# Altium PCB PCB_运放.pcbdoc
Units mil, origin at the board's own origin, x right, y up, seen from the top; angles counter-clockwise.
Board outline 3086.21 x 3420 mil, 2 copper layers (Top Layer, Bottom Layer); 83 components, 58 nets, 212 pads, 8 vias.
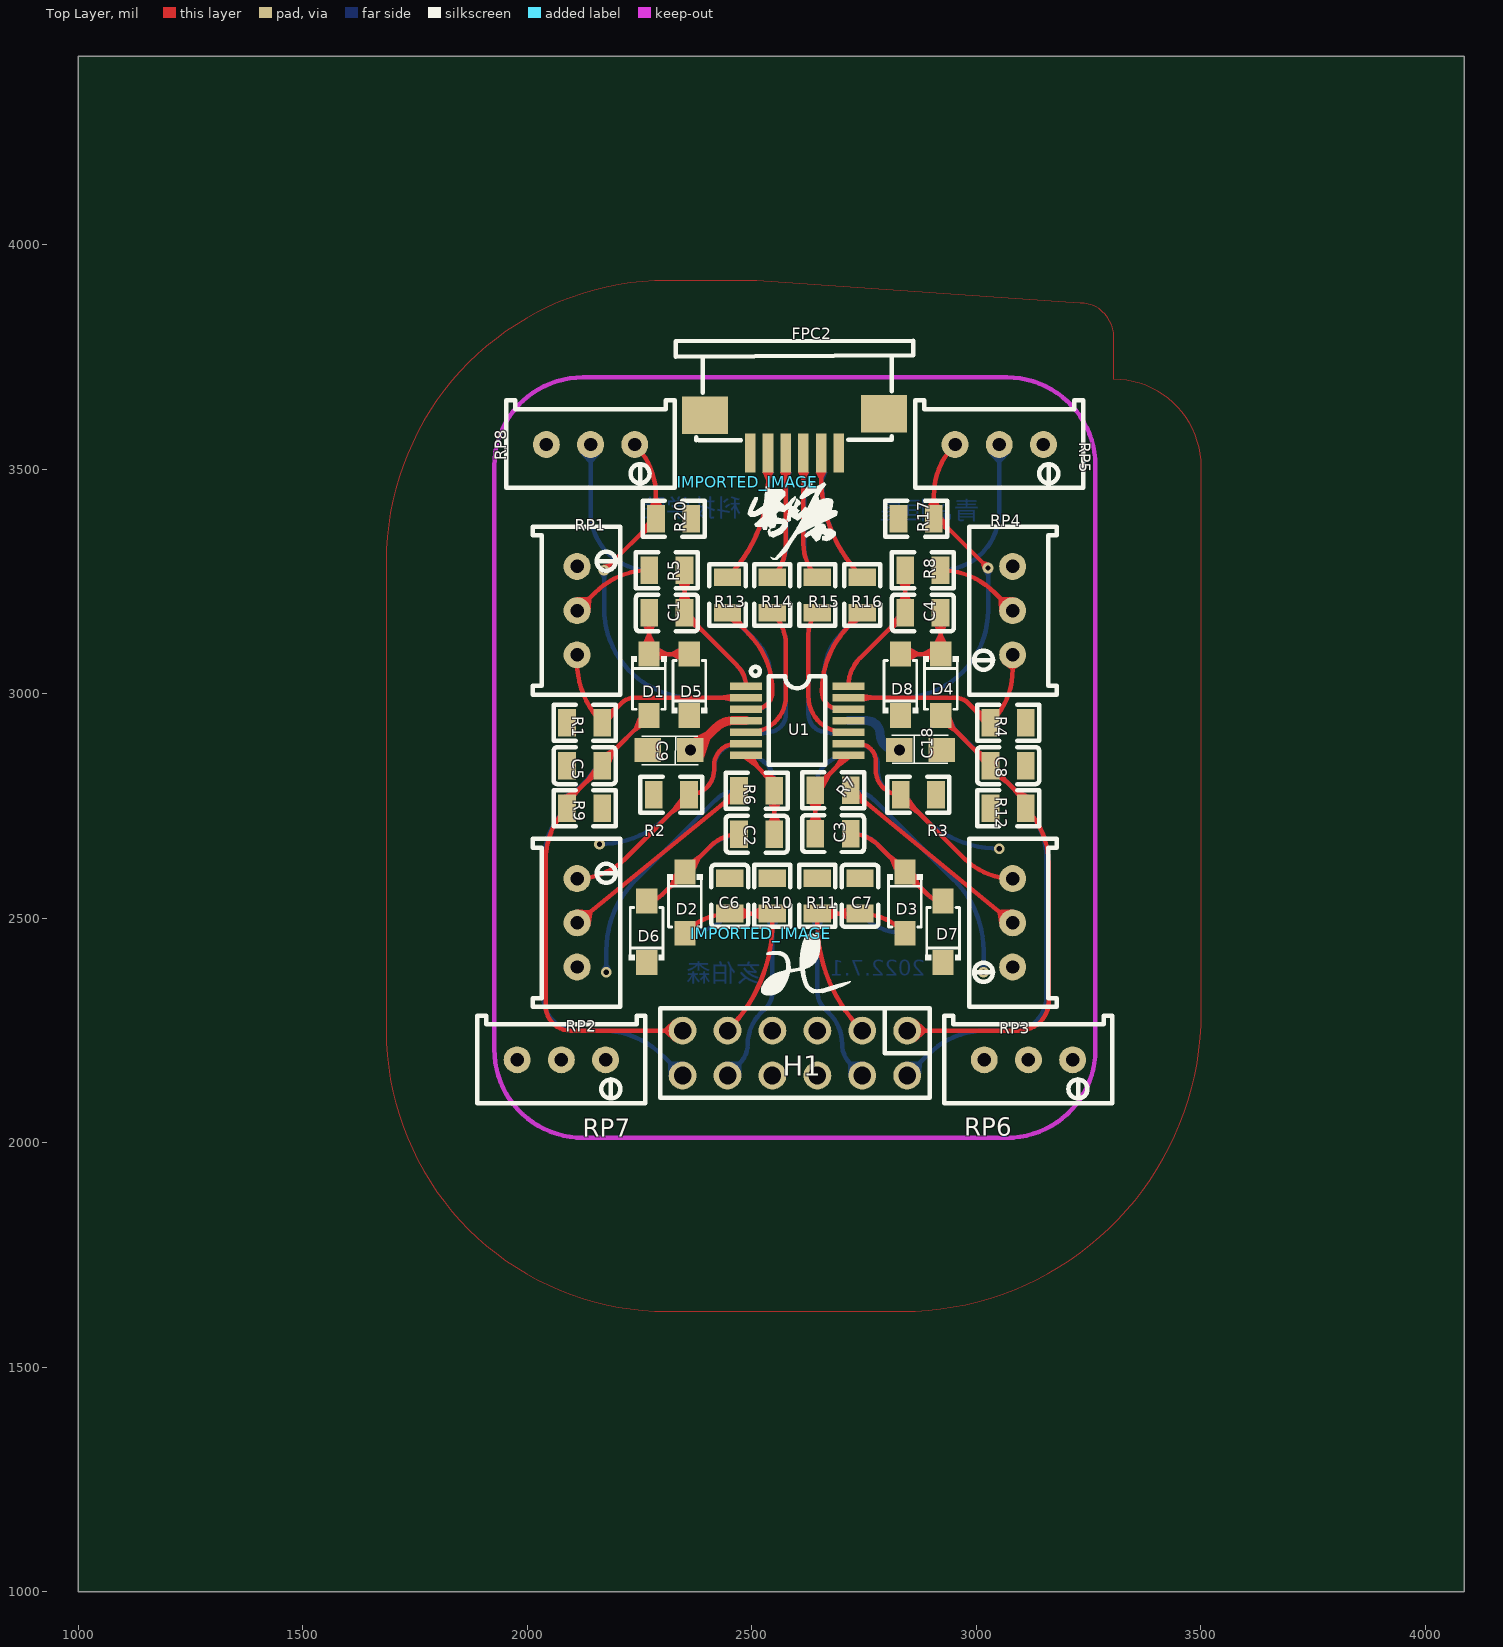
[diagram p0: Top Layer view]
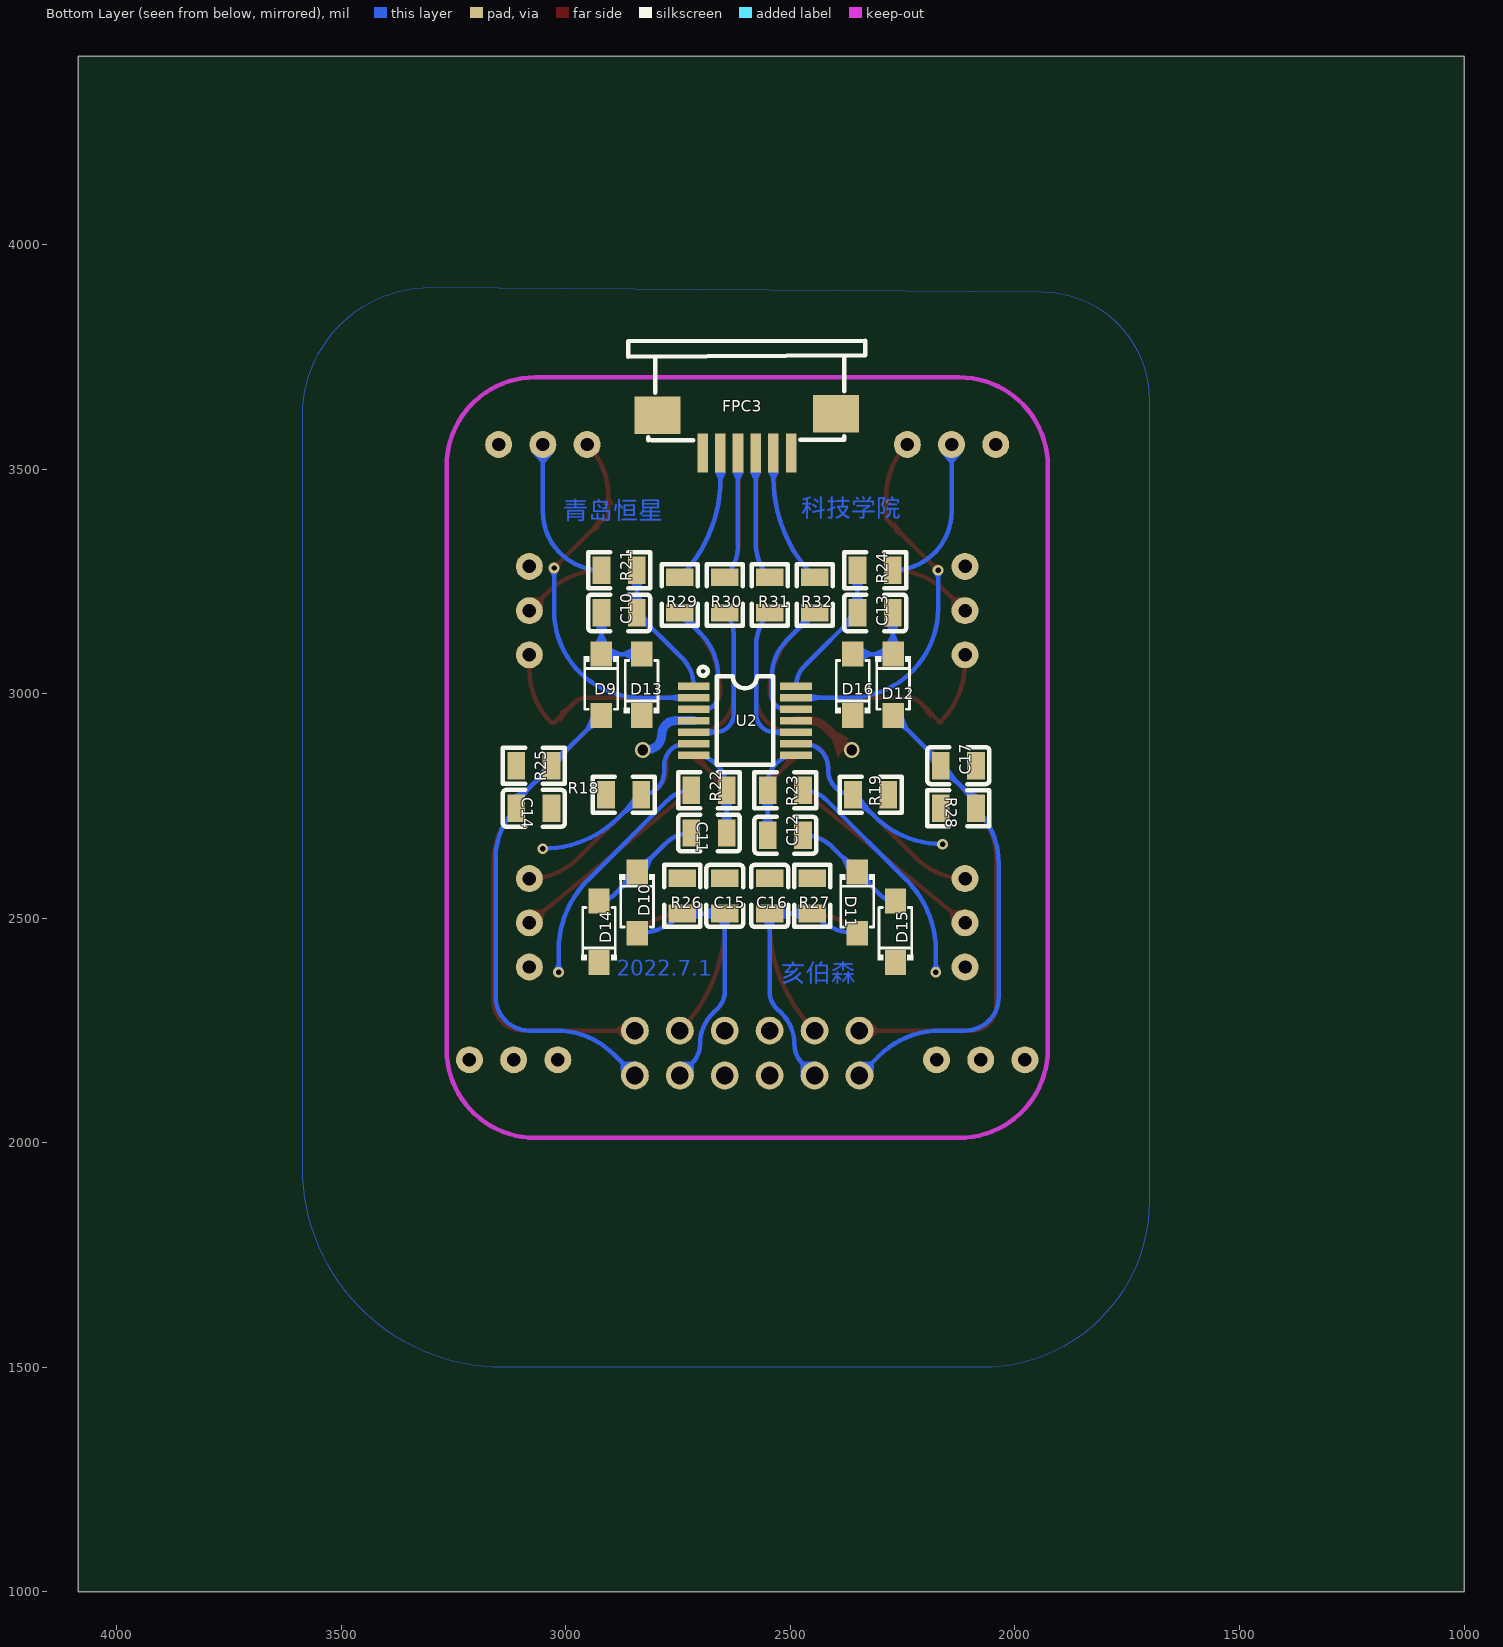
[diagram p1: Bottom Layer view, seen from below]

## Layer stack, top to bottom
Top Layer: signal copper (thickness not stored)
Dielectric: dielectric 12.6, FR-4, Dk 4.8
Bottom Layer: signal copper (thickness not stored)

## Board outline
4086.21,1000 1000,1000 1000,4420 4086.21,4420

## Components (designator, comment, footprint, x,y, rotation, side; value= is the part's Value field where it differs from the comment)
C1 "0.1uF" C0805#1 2311.21,3180 r180 top
C2 "0.1uF" C0805#1 2511.21,2687.19 r0 top
C3 "0.1uF" C0805#1 2681.21,2688.6 r180 top
C4 "0.1uF" C0805#1 2881.21,3180 r0 top
C5 "0.1uF" C0805#1 2128.02,2840 r180 top
C6 "0.1uF" C0805#1 2451.21,2550 r90 top
C7 "0.1uF" C0805#1 2741.21,2550 r270 top
C8 "0.1uF" C0805#1 3071.21,2840 r180 top
C9 "106 16V" CASE-A_3216 2316.21,2875 r180 top
C10 "0.1uF" C0805#2 2881.21,3180 r180 bottom
C11 "0.1uF" C0805#2 2681.21,2690 r0 bottom
C12 "0.1uF" C0805#2 2511.21,2685 r180 bottom
C13 "0.1uF" C0805#2 2311.21,3180 r0 bottom
C14 "0.1uF" C0805#2 3071.21,2745 r0 bottom
C15 "0.1uF" C0805#2 2646.21,2550 r270 bottom
C16 "0.1uF" C0805#2 2546.21,2550 r90 bottom
C17 "0.1uF" C0805#2 2126.21,2840 r180 bottom
C18 "106 16V" CASE-A_3216 2876.21,2875 r0 top
D1 "1N5819" SOD-123FL_L2.7-W1.8-LS3.8-RD#1 2271.21,3020 r270 top
D2 "1N5819" SOD-123FL_L2.7-W1.8-LS3.8-RD#1 2351.21,2535 r270 top
D3 "1N5819" SOD-123FL_L2.7-W1.8-LS3.8-RD#1 2841.21,2535 r270 top
D4 "1N5819" SOD-123FL_L2.7-W1.8-LS3.8-RD#1 2921.21,3020 r270 top
D5 "1N5819" SOD-123FL_L2.7-W1.8-LS3.8-RD#1 2361.21,3020 r90 top
D6 "1N5819" SOD-123FL_L2.7-W1.8-LS3.8-RD#1 2266.21,2470 r90 top
D7 "1N5819" SOD-123FL_L2.7-W1.8-LS3.8-RD#1 2926.21,2470 r90 top
D8 "1N5819" SOD-123FL_L2.7-W1.8-LS3.8-RD#1 2831.21,3020 r90 top
D9 "1N5819" SOD-123FL_L2.7-W1.8-LS3.8-RD#2 2921.21,3020 r90 bottom
D10 "1N5819" SOD-123FL_L2.7-W1.8-LS3.8-RD#2 2841.21,2535 r90 bottom
D11 "1N5819" SOD-123FL_L2.7-W1.8-LS3.8-RD#2 2351.21,2535 r90 bottom
D12 "1N5819" SOD-123FL_L2.7-W1.8-LS3.8-RD#2 2271.21,3020 r90 bottom
D13 "1N5819" SOD-123FL_L2.7-W1.8-LS3.8-RD#2 2831.21,3020 r270 bottom
D14 "1N5819" SOD-123FL_L2.7-W1.8-LS3.8-RD#2 2926.21,2470 r270 bottom
D15 "1N5819" SOD-123FL_L2.7-W1.8-LS3.8-RD#2 2266.21,2470 r270 bottom
D16 "1N5819" SOD-123FL_L2.7-W1.8-LS3.8-RD#2 2361.21,3020 r270 bottom
FPC2 "FPC1.0-6P" FPC-SMD_8P-P1.00_FPC1.0-8P-SJ#1 2556.21,3580 r0 top
FPC3 "FPC1.0-6P" FPC-SMD_8P-P1.00_FPC1.0-8P-SJ#2 2636.21,3580 r0 bottom
H1 "排母2X6P" KY-排母2*6P间距2.54MM 2846.21,2250 r180 top
IMPORTED_IMAGE "IMPORTED_IMAGE" IMPORTED_IMAGE 2521.22,2465.24 r0 top
IMPORTED_IMAGE "IMPORTED_IMAGE" IMPORTED_IMAGE 2491.23,3470.54 r0 top
R1 "1k" R0805#1 2128.02,2935 r180 top
R2 "1k" R0805#1 2321.21,2775 r0 top
R3 "1k" R0805#1 2871.21,2775 r180 top
R4 "1k" R0805#1 3071.21,2935 r180 top
R5 "47k" R0805#1 2311.21,3275 r0 top
R6 "47k" R0805#1 2511.21,2783.59 r180 top
R7 "47k" R0805#1 2681.21,2785 r0 top
R8 "47k" R0805#1 2881.21,3275 r0 top
R9 "47k" R0805#1 2128.02,2745 r180 top
R10 "47k" R0805#1 2546.21,2550 r270 top
R11 "47k" R0805#1 2646.21,2550 r90 top
R12 "47k" R0805#1 3071.21,2745 r180 top
R13 "5.1k" R0805#1 2446.21,3220 r270 top
R14 "5.1k" R0805#1 2546.21,3220 r270 top
R15 "5.1k" R0805#1 2646.21,3220 r90 top
R16 "5.1k" R0805#1 2746.21,3220 r90 top
R17 "1k" R0805#1 2866.21,3390 r180 top
R18 "1k" R0805#2 2871.21,2775 r0 bottom
R19 "1k" R0805#2 2321.21,2775 r180 bottom
R20 "1k" R0805#1 2326.21,3390 r180 top
R21 "47k" R0805#2 2881.21,3275 r0 bottom
R22 "47k" R0805#2 2681.21,2785 r180 bottom
R23 "47k" R0805#2 2511.21,2785 r0 bottom
R24 "47k" R0805#2 2311.21,3275 r0 bottom
R25 "47k" R0805#2 3071.21,2840 r0 bottom
R26 "47k" R0805#2 2741.21,2550 r90 bottom
R27 "47k" R0805#2 2451.21,2550 r270 bottom
R28 "47k" R0805#2 2126.21,2745 r180 bottom
R29 "5.1k" R0805#2 2746.21,3220 r90 bottom
R30 "5.1k" R0805#2 2646.21,3220 r90 bottom
R31 "5.1k" R0805#2 2546.21,3220 r270 bottom
R32 "5.1k" R0805#2 2446.21,3220 r270 bottom
RP1 "500K" RES-ADJ-TH_3P-L9.5-W4.85-P2.50-BL-BS 2111.21,3185 r0 top
RP2 "500K" RES-ADJ-TH_3P-L9.5-W4.85-P2.50-BL-BS 2111.21,2490 r0 top
RP3 "500K" RES-ADJ-TH_3P-L9.5-W4.85-P2.50-BL-BS 3081.21,2490 r180 top
RP4 "500K" RES-ADJ-TH_3P-L9.5-W4.85-P2.50-BL-BS 3081.21,3185 r180 top
RP5 "500K" RES-ADJ-TH_3P-L9.5-W4.85-P2.50-BL-BS 3051.21,3555 r270 top
RP6 "500K" RES-ADJ-TH_3P-L9.5-W4.85-P2.50-BL-BS 3116.21,2185 r270 top
RP7 "500K" RES-ADJ-TH_3P-L9.5-W4.85-P2.50-BL-BS 2076.21,2185 r270 top
RP8 "500K" RES-ADJ-TH_3P-L9.5-W4.85-P2.50-BL-BS 2141.21,3555 r270 top
U1 "OPA4377" OPA4377#1 2601.21,2940 r0 top
U2 "OPA4377" OPA4377#2 2601.21,2940 r0 bottom
? "" ? 2049.11,2857.5 r0 top
? "" ? 2596.21,2382.55 r0 top

## Footprints (in the part's own frame and the unit in brackets; to place one, negate y for a bottom-side part, rotate by r counter-clockwise, add the part's x,y. Pads: shape width x height; smd on the part's side, far side on the other; paste and mask are expansions set on the pad)
C0805#1 [mm]
  rect 1x1.55 smd paste+0 mask+0.102: 1(-1,0) 2(1,0)
  silkscreen extent -1.75,-1.04 1.75,1.04
C0805#2 [mm]
  rect 1x1.55 smd paste+0 mask+0.102: 1(1,0) 2(-1,0)
  silkscreen extent -1.75,-1.04 1.75,1.04
CASE-A_3216 [mm]
  rect 1.5x1.359 smd paste+0 mask+0.051: 1(-1.2,0) 2(1.2,0)
  silkscreen extent -1.64,-0.76 1.56,0.84
FPC-SMD_8P-P1.00_FPC1.0-8P-SJ#1 [mm]
  rect 0.6x2.2 smd paste+0 mask+0.051: 1(3.497,-1.106) 2(2.497,-1.106) 3(1.495,-1.105) 4(0.496,-1.106) 5(-0.504,-1.106) 6(-1.504,-1.106)
  rect 2.6x2.1 smd paste+0 mask+0.051: 9(6.045,1.106) 10(-4.064,1.016)
  silkscreen extent -5.71,-0.38 7.71,5.24
FPC-SMD_8P-P1.00_FPC1.0-8P-SJ#2 [mm]
  rect 0.6x2.2 smd paste+0 mask+0.051: 1(-3.497,1.106) 2(-2.497,1.106) 3(-1.495,1.105) 4(-0.496,1.106) 5(0.504,1.106) 6(1.504,1.106)
  rect 2.6x2.1 smd paste+0 mask+0.051: 9(-6.045,-1.106) 10(4.064,-1.016)
  silkscreen extent -7.71,-5.24 5.71,0.38
IMPORTED_IMAGE [mil]
  silkscreen extent 0,-137 199,1
KY-排母2*6P间距2.54MM [mil]
  round 62 hole 39 paste+0 mask+2: 1(0,0) 2(0,100) 3(100,0) 4(100,100) 5(200,0) 6(200,100) 7(300,0) 8(300,100) 9(400,0) 10(400,100) 11(500,0) 12(500,100)
  silkscreen extent -50,-50 550,150
OPA4377#1 [mil]
  rect 71x16 smd paste+0 mask+4: 1(-114,76.77) 2(-114,51.18) 3(-114,25.59) 5(-114,-25.59) 6(-114,-51.18) 7(-114,-76.77) 8(114,-76.77) 9(114,-51.18) 10(114,-25.59) 12(114,25.59) 13(114,51.18) 14(114,76.77)
  rect 71x16 smd paste+0 mask+2: 4(-114,0) 11(114,0)
  silkscreen extent -103,-98 63,120
OPA4377#2 [mil]
  rect 71x16 smd paste+0 mask+4: 1(114,-76.77) 2(114,-51.18) 3(114,-25.59) 5(114,25.59) 6(114,51.18) 7(114,76.77) 8(-114,76.77) 9(-114,51.18) 10(-114,25.59) 12(-114,-25.59) 13(-114,-51.18) 14(-114,-76.77)
  rect 71x16 smd paste+0 mask+2: 4(114,0) 11(-114,0)
  silkscreen extent -63,-120 103,98
R0805#1 [mm]
  rect 1x1.55 smd paste+0 mask+0.102: 1(-1,0) 2(1,0)
  silkscreen extent -1.75,-1.02 1.75,1.02
R0805#2 [mm]
  rect 1x1.55 smd paste+0 mask+0.102: 1(1,0) 2(-1,0)
  silkscreen extent -1.75,-1.02 1.75,1.02
RES-ADJ-TH_3P-L9.5-W4.85-P2.50-BL-BS [mil]
  round 60 hole 30 paste+0 mask+2: 1(0,98.43) 2(0,0) 3(0,-98.43)
  silkscreen extent -98,-187 96,187
SOD-123FL_L2.7-W1.8-LS3.8-RD#1 [mm]
  rect 1.4x1.2 smd paste+0 mask+0.051: 1(-1.735,0) 2(1.735,0)
  silkscreen extent -1.6,-1 1.38,1
SOD-123FL_L2.7-W1.8-LS3.8-RD#2 [mm]
  rect 1.4x1.2 smd paste+0 mask+0.051: 1(1.735,0) 2(-1.735,0)
  silkscreen extent -1.38,-1 1.6,1
? [mil]

## Via types
v1: diameter 24.02, hole 12, Top Layer to Bottom Layer, tented both sides, 6 vias
v2: diameter 35, hole 24, Top Layer to Bottom Layer, tented both sides, 2 vias

## Nets (pads, with @x,y where several pads share a name; then routed paths per layer and width w, separated by ;. In a path a pad name is that pad's centre, name@x,y a point inside that pad or via, vN(x,y) a via of type N, cw(c..) or ccw(c..) an arc to the next point about the centre after c; other vN are vias at no path point)
C1_2: C1.2 D1.1 D5.2 | length 181.9
  Top Layer w10: D1.1@2271.81,3089.8 C1.2 ; D1.1@2271.84,3089.83 cw(c2269.69,3089.83) D1.1 D5.2
C2_1: C2.1 D2.1 D6.2 | length 261.4
  Top Layer w10: D6.2 ccw(c2266.21,2586.59) 2300.35,2552.45 ; 2300.31,2552.5 D2.1 2409.11,2661.2 cw(c2471.84,2598.47) C2.1
C3_1: C3.1 D3.1 D7.2 | length 262.1
  Top Layer w10: C3.1 cw(c2720.58,2603.28) 2780.91,2663.61 D3.1 2892.11,2552.5 ; 2892.07,2552.45 ccw(c2926.21,2586.59) D7.2
C4_2: C4.2 D4.1 D8.2 | length 181.9
  Top Layer w10: D8.2 D4.1 cw(c2922.73,3089.83) D4.1@2920.58,3089.83 ; D4.1@2920.61,3089.8 C4.2
C10_2: C10.2 D9.1 D13.2 | length 181.9
  Bottom Layer w10: D13.2 D9.1 cw(c2922.73,3089.83) D9.1@2920.58,3089.83 ; D9.1@2920.61,3089.8 C10.2
C11_1: C11.1 D10.1 D14.2 | length 262.9
  Bottom Layer w10: C11.1 cw(c2720.58,2608.06) 2778.52,2666 D10.1 2892.11,2552.5 ; 2892.07,2552.45 ccw(c2926.21,2586.59) D14.2
C12_1: C12.1 D11.1 D15.2 | length 260.3
  Bottom Layer w10: D15.2 ccw(c2266.21,2586.59) 2300.35,2552.45 ; 2300.31,2552.5 D11.1 2405.41,2657.5 ; 2405.37,2657.47 cw(c2471.84,2590.99) C12.1
C13_2: C13.2 D12.1 D16.2 | length 181.9
  Bottom Layer w10: D12.1@2271.81,3089.8 C13.2 ; D12.1@2271.84,3089.83 cw(c2269.69,3089.83) D12.1 D16.2
GND: C5.2 C6.2 C7.1 C8.1 C9.2 C14.2 C15.2 C16.1 C17.1 C18.2 D5.1 D6.1 D7.1 D8.1 D13.1 D14.1 D15.1 D16.1 FPC2.1 FPC2.6 FPC3.1 FPC3.6 H1.7 R1.2 R2.1 R3.1 R4.1 R9.1 R10.1 R11.2 R12.2 R17.2 R18.1 R19.1 R20.1 R25.1 R26.1 R27.2 R28.2 U1.11 U2.11
IN1: FPC2.5 R13.1 | length 301.3
  Top Layer w10: R13.1 ccw(c2228.55,3477.04) 2536.37,3477.03 ; 2536.41,3477 FPC2.5
IN2: FPC2.4 R14.1 | length 285
  Top Layer w10: R14.1 ccw(c2474.92,3330.66) 2575.74,3330.66 ; 2575.71,3330.7 FPC2.4
IN3: FPC2.3 R15.2 | length 285.5
  Top Layer w10: 2615.07,3334.55 ccw(c2721.39,3334.55) R15.2 ; 2615.11,3334.5 FPC2.3
IN4: FPC2.2 R16.2 | length 301.6
  Top Layer w10: 2654.51,3480.75 ccw(c2967.59,3480.75) R16.2 ; 2654.51,3480.8 FPC2.2
IN5: FPC3.5 R29.1 | length 301.3
  Bottom Layer w10: 2656.01,3477 FPC3.5 ; 2656.05,3477.03 ccw(c2963.88,3477.03) R29.1
IN6: FPC3.4 R30.1 | length 285.1
  Bottom Layer w10: 2616.71,3330.6 FPC3.4 ; 2616.68,3330.65 ccw(c2717.49,3330.65) R30.1
IN7: FPC3.3 R31.2 | length 292.5
  Bottom Layer w10: R31.2 ccw(c2471.04,3334.54) 2577.35,3334.54 ; R31.2 R31.2@2549.21,3265.7 ; 2577.31,3334.5 FPC3.3@2577.31,3536.5
IN8: FPC3.2 R32.2 | length 316.8
  Bottom Layer w10: R32.2@2456.87,3270.03 R32.2 ccw(c2224.83,3480.75) 2537.91,3480.75 ; 2537.91,3480.7 FPC3.2
OUT1: C5.1 D1.2 H1.11 R9.2 | length 1069
  Top Layer w10: R9.2@2100.11,2772.7 C5.1 cw(c2186.4,2839.99) C5.1@2172.96,2853.44 ; R9.2@2100.14,2772.74 ccw(c2127.88,2745.01) 2088.65,2745.01 ccw(c2203.18,2630.48) 2041.21,2630.48 2041.21,2305 ccw(c2096.21,2305) 2096.21,2250 H1.11 ; C5.1@2172.91,2853.4 D1.2
OUT2: C6.1 D2.2 H1.9 R10.2 | length 494.7
  Top Layer w10: D2.2 2355.51,2470.99 cw(c2451.21,2375.29) C6.1 ; H1.9 ccw(c2204.79,2491.42) 2546.21,2491.42 R10.2 ; C6.1 R10.2
OUT3: C7.2 D3.2 H1.3 R11.1 | length 494.7
  Top Layer w10: R11.1 C7.2 ; R11.1 2646.21,2491.42 ccw(c2987.63,2491.42) H1.3 ; C7.2 cw(c2741.21,2375.29) 2836.91,2470.99 D3.2
OUT4: C8.2 D4.2 H1.1 R12.1 | length 1084.1
  Top Layer w10: H1.1 3096.03,2250 ccw(c3096.03,2315.18) 3161.21,2315.18 ; D4.2 ccw(c2923.77,2951.69) D4.2@2921.96,2949.88 ; D4.2@2921.91,2949.9 C8.2 R12.1@3099.11,2772.8 ; R12.1@3099.08,2772.76 cw(c3071.32,2745) R12.1 cw(c2988.35,2622.77) 3161.21,2622.77 3161.21,2310
OUT5: C14.1 D9.2 H1.2 R25.2 | length 1102
  Bottom Layer w10: H1.2 2893.18,2196.97 cw(c3021.21,2068.93) 3021.21,2250 3081.21,2250 ccw(c3081.21,2325) 3156.21,2325 3156.21,2634.84 ccw(c3000.42,2634.84) C14.1 ccw(c3071.32,2745) C14.1@3099.08,2772.76 ; D9.2 3031.11,2841.8 cw(c3029.28,2840) R25.2 ; R25.2 C14.1@3099.11,2772.8
OUT6: C15.1 D10.2 H1.4 R26.2 | length 600.5
  Bottom Layer w10: R26.2 C15.1 2646.21,2336.2 ccw(c2697.42,2336.21) 2661.21,2300 2672.93,2288.28 cw(c2604.64,2220) 2701.21,2220 ccw(c2761.57,2220) 2718.89,2177.32 H1.4 ; R26.2 2745.51,2506.33 ccw(c2841.21,2602.03) D10.2
OUT7: C16.2 D11.2 H1.10 R27.1 | length 600.5
  Bottom Layer w10: D11.2 ccw(c2351.21,2602.03) 2446.91,2506.33 R27.1 ; H1.10 2473.53,2177.32 ccw(c2430.86,2220) 2491.21,2220 cw(c2587.78,2220) 2519.49,2288.28 2531.21,2300 ccw(c2495,2336.21) 2546.21,2336.21 C16.2 R27.1
OUT8: C17.2 D12.2 H1.12 R28.1 | length 1100.2
  Bottom Layer w10: R28.1@2098.31,2772.8 C17.2 cw(c2180.21,2840) C17.2@2169.86,2850.35 ; R28.1@2098.34,2772.76 ccw(c2126.09,2745) R28.1 ccw(c2209.07,2622.77) 2036.21,2622.77 2036.21,2325 ccw(c2111.21,2325) 2111.21,2250 2166.21,2250 cw(c2166.21,2056.86) 2302.78,2193.43 H1.12 ; C17.2@2169.91,2850.3 D12.2
R5_1: R5.1 RP1.2 | length 190.6
  Top Layer w10: RP1.2 2151.28,3225.06 cw(c2271.84,3104.51) R5.1
R6_2: R6.2 RP2.2 | length 465
  Top Layer w10: RP2.2 R6.2
R7_2: R7.2 RP3.2 | length 465.9
  Top Layer w10: R7.2 RP3.2
R8_2: R8.2 RP4.2 | length 190.6
  Top Layer w10: R8.2 cw(c2920.58,3104.48) 3041.15,3225.06 RP4.2
R21_1: R21.1 RP5.2 | length 354.6
  Bottom Layer w10: R21.1 ccw(c2920.58,3405.62) 3051.2,3405.62 RP5.2
R22_2: R22.2 RP6.2 | length 759.2
  Mid-Layer 2 w10: v1(3016.21,2380) ccw(c3245.58,2380) 3083.39,2217.81 RP6.2
  Bottom Layer w10: R22.2 cw(c2720.58,2711.05) 2772.87,2763.34 2951.21,2585 cw(c2794.29,2428.08) 3016.21,2428.08 v1(3016.21,2380)
R23_2: R23.2 RP7.2 | length 759.2
  Mid-Layer 2 w10: RP7.2 2109.03,2217.82 ccw(c1946.86,2380) v1(2176.21,2380)
  Bottom Layer w10: v1(2176.21,2380) 2176.21,2428.08 cw(c2398.13,2428.08) 2241.21,2585 2419.55,2763.34 cw(c2471.84,2711.05) R23.2
R24_2: R24.2 RP8.2 | length 354.6
  Bottom Layer w10: RP8.2 2141.21,3405.63 ccw(c2271.84,3405.63) R24.2
U1_1: C1.1 R5.2 U1.1 | length 312
  Top Layer w10: R5.2 C1.1 2468.41,3062.2 cw(c2422.99,3016.77) U1.1
U1_2: R1.1 RP1.3 U1.2 | length 508.6
  Top Layer w10: RP1.3 2111.21,3070.63 ccw(c2303.02,3070.63) R1.1 cw(c2170.25,2935) R1.1@2168.23,2937.02 ; R1.1@2168.21,2937 2211.21,2980 cw(c2238.2,2953.01) 2238.2,2991.18 U1.2
U1_3: R13.2 U1.3 | length 290.7
  Top Layer w10: R13.2 2492.71,3134.1 ; U1.3 2506.8,2965.59 ccw(c2506.8,3005) 2546.21,3005 ccw(c2363.62,3005) 2492.73,3134.11
U1_5: R14.2 U1.5 | length 328.6
  Top Layer w10: U1.5 2495.62,2914.41 ccw(c2495.62,2995) 2576.21,2995 2576.21,3108.2 ccw(c2473.78,3108.2) R14.2
U1_6: R2.2 RP2.1 U1.6 | length 515.8
  Top Layer w10: RP2.1 ccw(c2111.21,2740.04) 2218.42,2632.84 ; 2218.41,2632.8 R2.2 ccw(c2360.58,2830.63) 2416.21,2830.63 2416.21,2840 cw(c2465.03,2840) 2465.03,2888.82 U1.6
U1_7: C2.2 R6.1 U1.7 | length 200.6
  Top Layer w10: U1.7 R6.1@2539.11,2811.4 ; R6.1@2539.08,2811.36 cw(c2511.3,2783.59) R6.1 C2.2
U1_8: C3.2 R7.1 U1.8 | length 204.5
  Top Layer w10: C3.2 R7.1 ; R7.1 cw(c2653.57,2785) 2645.28,2793.3 U1.8
U1_9: R3.2 RP3.3 U1.9 | length 510.1
  Top Layer w10: U1.9 2737.39,2888.82 cw(c2737.39,2850) 2776.21,2850 2776.21,2830.63 ccw(c2831.84,2830.63) R3.2 ; R3.2 2974.01,2632.8 ccw(c3081.21,2740.01) RP3.3
U1_10: R15.1 U1.10 | length 326
  Top Layer w10: R15.1 ccw(c2694.49,3132.35) 2626.21,3132.35 2626.21,2995 ccw(c2706.8,2995) 2706.8,2914.41 U1.10
U1_12: R16.1 U1.12 | length 285.5
  Top Layer w10: U1.12 2695.62,2965.59 cw(c2695.62,3005) 2656.21,3005 cw(c2862.94,3005) 2716.76,3151.18 ; 2716.71,3151.2 R16.1
U1_13: R4.2 RP4.1 U1.13 | length 502.4
  Top Layer w10: U1.13 2954.21,2991.2 cw(c2954.22,2953.01) 2981.21,2980 R4.2@3022.21,2939 ; R4.2@3022.23,2938.98 ccw(c3031.84,2948.59) R4.2 ccw(c2912.65,3054.19) 3081.21,3054.19 RP4.1
U1_14: C4.1 R8.1 U1.14 | length 306.8
  Top Layer w10: U1.14 cw(c2803.57,3016.77) 2741.09,3079.25 ; 2741.11,3079.3 C4.1 R8.1
U2_1: C10.1 R21.2 U2.1 | length 306.9
  Bottom Layer w10: U2.1 cw(c2803.56,3016.78) 2741.09,3079.25 ; 2741.11,3079.2 C10.1 R21.2
U2_2: R17.1 RP5.3 U2.2 | length 859.3
  Top Layer w10: 2905.61,3441 R17.1 cw(c2905.58,3364.32) R17.1@2923.74,3382.47 ; 2905.58,3441.05 cw(c3066.73,3441.05) RP5.3 ; R17.1@2923.71,3382.5 v1(3026.21,3280)
  Bottom Layer w10: U2.2 2832.41,2991.2 ccw(c2832.39,3185) 3026.21,3185 v1(3026.21,3280)
U2_3: R29.2 U2.3 | length 285.8
  Bottom Layer w10: 2700.51,3135 R29.2 ; 2700.54,3134.96 ccw(c2795.5,3040) 2661.21,3040 2661.21,2995 ccw(c2690.62,2995) 2690.62,2965.59 U2.3
U2_5: R30.2 U2.5 | length 343.1
  Bottom Layer w10: R30.2 ccw(c2694.48,3132.35) 2626.21,3132.35 2626.21,2955 ccw(c2666.8,2955) 2666.8,2914.41 U2.5
U2_6: R18.2 RP6.1 U2.6 | length 1009.8
  Mid-Layer 2 w10: v1(3051.21,2655) cw(c3051.21,2491.58) 3214.63,2491.58 RP6.1
  Bottom Layer w10: U2.6 2732.39,2888.82 cw(c2732.39,2840) 2781.21,2840 2781.21,2825.63 ccw(c2831.84,2825.63) R18.2 ; R18.2 2881.61,2725.3 ; 2881.57,2725.27 ccw(c3051.21,2894.9) v1(3051.21,2655)
U2_7: C11.2 R22.1 U2.7 | length 215.1
  Bottom Layer w10: C11.2 R22.1 ; R22.1 2641.84,2789.86 cw(c2715.21,2789.86) U2.7
U2_8: C12.2 R23.1 U2.8 | length 214.4
  Bottom Layer w10: U2.8 cw(c2487.21,2799.86) 2550.58,2799.86 R23.1 C12.2
U2_9: R19.2 RP7.3 U2.9 | length 1013.8
  Mid-Layer 2 w10: RP7.3 1977.79,2481.58 cw(c2161.21,2481.58) v1(2161.21,2665)
  Bottom Layer w10: v1(2161.21,2665) ccw(c2161.21,2880.76) 2313.77,2728.19 ; 2313.81,2728.2 R19.2 ccw(c2360.58,2830.63) 2416.21,2830.63 2416.21,2835 cw(c2470.03,2835) 2470.03,2888.82 U2.9
U2_10: R31.1 U2.10 | length 345.8
  Bottom Layer w10: U2.10 2535.61,2914.4 ccw(c2535.61,2955) 2576.21,2955 2576.21,3108.21 ccw(c2473.79,3108.21) R31.1
U2_12: R32.1 U2.12 | length 291
  Bottom Layer w10: R32.1 2508.91,3117.9 ; U2.12 2511.8,2965.59 ccw(c2511.8,2995) 2541.21,2995 2541.21,3040 ccw(c2431.06,3040) 2508.95,3117.89
U2_13: R20.2 RP8.1 U2.13 | length 855.3
  Top Layer w10: v1(2171.21,3275) ccw(c2171.21,3276.53) v1@2172.29,3275.45 ; v1@2172.31,3275.4 R20.2 2286.81,3441 ; RP8.1 cw(c2125.69,3441.05) 2286.84,3441.05
  Bottom Layer w10: v1(2171.21,3275) 2171.21,3190 ccw(c2370.03,3190) 2370.03,2991.18 2380.03,2991.18 U2.13
U2_14: C13.1 R24.1 U2.14 | length 312
  Bottom Layer w10: R24.1 C13.1 2468.41,3062.2 cw(c2423,3016.78) U2.14
VCC: C9.1 C18.1 H1.5 U1.4 U2.4 | length 1678.9
  Top Layer w20: v2(2363.45,2875) ccw(c2363.45,2893.73) 2376.7,2880.49 2421.21,2925 cw(c2457.42,2888.79) 2457.42,2940 U1.4
  Mid-Layer 1 w20: v2(2363.45,2875) ccw(c3189.69,2875) 2605.45,2290.76 H1.5 ccw(c2204.99,2691.22) 2828.97,2691.22 v2(2828.97,2875)
  Bottom Layer w20: U2.4 2756.21,2940 cw(c2756.22,2910) 2786.21,2910 ccw(c2821.21,2910) 2821.21,2875 v2(2828.97,2875)
pads on no net: FPC2.9 FPC2.10 FPC3.9 FPC3.10 H1.6 H1.8 RP1.1 RP2.3 RP3.1 RP4.3 RP5.1 RP6.3 RP7.1 RP8.3

## Polygon pours and split planes (outlines as drawn)
GND on Top Layer (solid): 2511.21,3920 2311.21,3920 ccw(c2311.21,3295) 1686.21,3295 1686.21,2250 ccw(c2311.21,2250) 2311.21,1625 2836.21,1625 ccw(c2836.21,2290) 3501.21,2290 3501.21,3505 ccw(c3306.21,3505) 3306.21,3700 3306.21,3795 ccw(c3231.21,3795) 3231.21,3870
GND on Bottom Layer (solid): 1941.21,3895 ccw(c1941.21,3655) 1701.21,3655 1701.21,1870 ccw(c2071.21,1870) 2071.21,1500 3141.21,1500 ccw(c3141.21,1945) 3586.21,1945 3586.21,2530 3586.21,3620 ccw(c3301.21,3620) 3301.21,3905

## Keep-outs
Keep-Out Layer:
  lines w10: 1926.92,2208.23 ccw(c2123.77,2208.23) 2123.77,2011.38 ; 1926.92,3507.44 cw(c2123.77,3507.44) 2123.77,3704.29 ; 3068.65,2011.38 ccw(c3068.65,2208.23) 3265.5,2208.23 ; 3068.65,3704.29 cw(c3068.65,3507.44) 3265.5,3507.44

## Other copper
Top Layer:
  region net OUT4: 2864.81,2225.2 2864.81,2274.8 2886.51,2255 2886.51,2245
  region net OUT1: 2327.61,2225.2 2327.61,2274.8 2305.91,2255 2305.91,2245
  region net R5_1: 2140.91,3180.75 2106.97,3214.69 2135.25,3216.1 2142.32,3209.03
  region net R6_2: 2110.02,2519.98 2140.32,2482.75 2144.61,2510.74 2138.3,2518.5
  region net R7_2: 3052.08,2482.82 3082.47,2519.97 3054.19,2518.56 3047.86,2510.82
  region net R8_2: 3085.45,3214.7 3051.51,3180.76 3050.1,3209.04 3057.17,3216.11
  region net U1_13: 3105.21,3068.57 3057.21,3068.57 3076.21,3054.19 3086.21,3054.19
  region net VCC: 2379.16,2868.49 2365.3,2891.9 2377.21,2895.14 2387.73,2877.38
  region net U2_2: 3027.91,3291.88 3014.33,3278.3 3011.64,3287.5 3018.71,3294.57
  region net U2_13: 2183.04,3272.96 2169.86,3286.92 2179.12,3289.35 2185.99,3282.07
  region net U2_2: 2925.27,3393.44 2925.27,3368.44 2940.27,3358.87 2940.27,3373.02
  region net U2_2: 2893.08,3420.51 2918.08,3420.51 2910.58,3435.51 2900.58,3435.51
  region net U2_13: 2274.34,3420.51 2299.34,3420.51 2291.84,3435.51 2281.84,3435.51
  region net U2_13: 2267.15,3359.49 2267.15,3382.81 2252.15,3362.38 2252.15,3348.24
  region net U1_1: 2338.08,3210.51 2363.08,3210.51 2355.58,3225.51 2345.58,3225.51
  region net U1_1: 2370.27,3172.81 2370.27,3149.49 2385.27,3138.24 2385.27,3152.39
  region net C1_2: 2284.34,3149.49 2259.34,3149.49 2266.84,3134.49 2276.84,3134.49
  region net U1_7: 2538.08,2717.7 2563.08,2717.7 2555.58,2732.7 2545.58,2732.7
  region net U1_8: 2629.34,2719.11 2654.34,2719.11 2646.84,2734.11 2636.84,2734.11
  region net U1_14: 2829.34,3210.51 2854.34,3210.51 2846.84,3225.51 2836.84,3225.51
  region net U1_14: 2822.15,3149.49 2822.15,3172.81 2807.15,3152.39 2807.15,3138.24
  region net C4_2: 2933.08,3149.49 2908.08,3149.49 2915.58,3134.49 2925.58,3134.49
  region net OUT1: 2147.7,2809.49 2147.7,2832.81 2132.7,2812.38 2132.7,2798.24
  region net OUT1: 2177.58,2870.51 2187.07,2847.38 2194.76,2868.17 2190.64,2878.19
  region net OUT2: 2481.72,2523.13 2481.72,2498.13 2496.72,2505.63 2496.72,2515.63
  region net OUT3: 2710.7,2498.13 2710.7,2523.13 2695.7,2515.63 2695.7,2505.63
  region net OUT4: 3051.52,2832.81 3051.52,2809.49 3066.52,2798.24 3066.52,2812.39
  region net OUT4: 3012.15,2847.19 3012.15,2870.51 2997.15,2881.76 2997.15,2867.61
  region net VCC: 2371.37,2901.75 2392.98,2856.66 2407.06,2896.71 2397.89,2915.83
  region net OUT1: 2254.45,2924.14 2247.59,2948.18 2238.35,2925.9 2241.49,2914.89
  region net C1_2: 2294.83,3100.81 2294.83,3075.81 2309.83,3083.31 2309.83,3093.31
  region net C1_2: 2259.34,3115.86 2284.34,3115.86 2276.84,3130.86 2266.84,3130.86
  region net C2_1: 2334.43,2575.75 2327.59,2599.79 2318.33,2577.5 2321.46,2566.49
  region net C2_1: 2367.97,2630.86 2374.83,2606.82 2384.07,2629.1 2380.93,2640.1
  region net C3_1: 2864.83,2599.79 2857.99,2575.75 2870.96,2566.49 2874.09,2577.5
  region net C3_1: 2817.59,2606.82 2824.45,2630.86 2811.49,2640.1 2808.35,2629.1
  region net OUT4: 2944.83,2947.17 2935.1,2924.14 2948.19,2916.57 2952.39,2926.52
  region net C4_2: 2897.59,3075.81 2897.59,3100.81 2882.59,3093.31 2882.59,3083.31
  region net C4_2: 2908.08,3115.86 2933.08,3115.86 2925.58,3130.86 2915.58,3130.86
  region net C1_2: 2337.59,3075.81 2337.59,3100.81 2322.59,3093.31 2322.59,3083.31
  region net C4_2: 2854.83,3100.81 2854.83,3075.81 2869.83,3083.31 2869.83,3093.31
  region net IN1: 2548.18,3493.16 2524.56,3493.16 2531.37,3478.16 2541.37,3478.16
  region net IN2: 2587.55,3493.16 2563.93,3493.16 2570.74,3478.16 2580.74,3478.16
  region net IN3: 2626.88,3493.19 2603.26,3493.19 2610.07,3478.19 2620.07,3478.19
  region net IN4: 2666.32,3493.16 2642.7,3493.16 2649.51,3480.75 2659.51,3480.75
  region net U1_2: 2187.07,2965.51 2187.07,2943.36 2202.07,2963.79 2202.07,2977.94
  region net U1_6: 2340.9,2744.49 2340.9,2767.81 2325.9,2747.39 2325.9,2733.24
  region net U1_9: 2851.52,2767.81 2851.52,2744.49 2866.52,2733.24 2866.52,2747.39
  region net U1_13: 3012.15,2936.56 3012.15,2961.56 2997.15,2971.13 2997.15,2956.98
  region net U1_1: 2363.08,3244.49 2338.08,3244.49 2345.58,3229.49 2355.58,3229.49
  region net R6_2: 2452.15,2755.06 2452.15,2780.06 2437.15,2761.8 2437.15,2748.9
  region net U1_7: 2563.08,2753.08 2538.08,2753.08 2545.58,2738.08 2555.58,2738.08
  region net U1_7: 2530.9,2810.87 2555.69,2814.11 2531.44,2826.07 2518.93,2824.44
  region net R7_2: 2740.27,2781.4 2740.27,2756.4 2755.27,2750.17 2755.27,2763.09
  region net U1_8: 2654.34,2754.49 2629.34,2754.49 2636.84,2739.49 2646.84,2739.49
  region net U1_8: 2659.42,2815.51 2661.52,2790.6 2674.48,2815.43 2673.38,2828.47
  region net U1_14: 2854.34,3244.49 2829.34,3244.49 2836.84,3229.49 2846.84,3229.49
  region net OUT1: 2083.55,2775.51 2108.33,2772.25 2120.28,2785.81 2107.78,2787.45
  region net OUT2: 2515.7,2498.13 2515.7,2523.13 2500.7,2515.63 2500.7,2505.63
  region net OUT3: 2676.72,2523.13 2676.72,2498.13 2691.72,2505.63 2691.72,2515.63
  region net OUT4: 3090.9,2772.26 3115.68,2775.51 3091.45,2787.46 3078.94,2785.83
  region net U1_3: 2476.72,3160.94 2453.4,3160.94 2473.82,3145.94 2487.97,3145.94
  region net U1_12: 2739.02,3160.94 2715.7,3160.94 2713.22,3154.71 2723.83,3151.18
  region net U1_2: 2451.71,2983.18 2451.71,2999.18 2436.71,2996.18 2436.71,2986.18
  region net U1_7: 2507.71,2855.23 2482.71,2855.23 2503.14,2840.23 2517.28,2840.23
  region net U1_8: 2719.71,2855.23 2694.71,2855.23 2685.14,2840.23 2699.28,2840.23
  region net U1_13: 2750.71,2999.18 2750.71,2983.18 2765.71,2986.18 2765.71,2996.18
Mid-Layer 1:
  region net VCC: 2650.59,2280.69 2615.52,2245.62 2610.64,2271.43 2624.78,2285.57
  region net VCC: 2842.57,2864.8 2815.37,2864.8 2818.97,2852.9 2838.97,2852.9
Mid-Layer 2:
  region net R22_2: 3120.44,2214.7 3086.5,2180.76 3085.09,2209.04 3092.16,2216.11
  region net U2_6: 3238.63,2203 3190.63,2203 3209.63,2224 3219.63,2224
  region net R23_2: 2105.91,2180.76 2071.97,2214.7 2100.25,2216.11 2107.32,2209.04
  region net U2_9: 2001.79,2203 1953.79,2203 1972.79,2224 1982.79,2224
Bottom Layer:
  region net R21_1: 3075.2,3537 3027.2,3537 3046.2,3516 3056.2,3516
  region net R24_2: 2165.21,3537 2117.21,3537 2136.21,3516 2146.21,3516
  region net OUT5: 2876.9,2145.62 2841.83,2180.69 2871.17,2182.03 2878.24,2174.96
  region net OUT6: 2750.59,2180.69 2715.52,2145.62 2715.35,2173.79 2722.42,2180.86
  region net OUT7: 2476.9,2145.62 2441.83,2180.69 2470,2180.86 2477.07,2173.79
  region net OUT8: 2350.59,2180.69 2315.52,2145.62 2314.18,2174.96 2321.25,2182.03
  region net R23_2: 2166.61,2387.2 2185.81,2387.2 2181.21,2395.6 2171.21,2395.6
  region net R22_2: 3006.61,2387.2 3025.81,2387.2 3021.21,2395.6 3011.21,2395.6
  region net U2_2: 3016.61,3272.8 3035.81,3272.8 3031.21,3264.4 3021.21,3264.4
  region net U2_13: 2161.61,3267.8 2180.81,3267.8 2176.21,3259.4 2166.21,3259.4
  region net U2_1: 2822.15,3172.81 2822.15,3149.49 2807.15,3138.24 2807.15,3152.39
  region net U2_1: 2854.34,3210.51 2829.34,3210.51 2836.84,3225.51 2846.84,3225.51
  region net C10_2: 2908.08,3149.49 2933.08,3149.49 2925.58,3134.49 2915.58,3134.49
  region net U2_7: 2654.34,2720.51 2629.34,2720.51 2636.84,2735.51 2646.84,2735.51
  region net U2_8: 2563.08,2715.51 2538.08,2715.51 2545.58,2730.51 2555.58,2730.51
  region net U2_14: 2370.27,3149.49 2370.27,3172.81 2385.27,3152.39 2385.27,3138.24
  region net U2_14: 2363.08,3210.51 2338.08,3210.51 2345.58,3225.51 2355.58,3225.51
  region net C13_2: 2259.34,3149.49 2284.34,3149.49 2276.84,3134.49 2266.84,3134.49
  region net OUT5: 3090.9,2772.26 3115.68,2775.51 3091.45,2787.46 3078.94,2785.83
  region net OUT6: 2676.72,2498.13 2676.72,2523.13 2691.72,2515.63 2691.72,2505.63
  region net OUT6: 2633.71,2490.94 2658.71,2490.94 2651.21,2475.94 2641.21,2475.94
  region net OUT7: 2515.7,2523.13 2515.7,2498.13 2500.7,2505.63 2500.7,2515.63
  region net OUT7: 2533.71,2490.94 2558.71,2490.94 2551.21,2475.94 2541.21,2475.94
  region net OUT8: 2180.49,2870.51 2185.27,2845.97 2195.99,2869.4 2193.69,2881.24
  region net OUT8: 2145.9,2832.81 2145.9,2809.49 2130.9,2798.24 2130.9,2812.39
  region net OUT5: 2944.83,2948.18 2937.97,2924.14 2950.93,2914.9 2954.07,2925.9
  region net C10_2: 2933.08,3115.86 2908.08,3115.86 2915.58,3130.86 2925.58,3130.86
  region net C10_2: 2897.59,3100.81 2897.59,3075.81 2882.59,3083.31 2882.59,3093.31
  region net C11_1: 2817.59,2606.82 2824.45,2630.86 2811.49,2640.1 2808.35,2629.1
  region net C11_1: 2864.83,2599.79 2857.99,2575.75 2870.96,2566.49 2874.09,2577.5
  region net C12_1: 2367.97,2630.86 2374.83,2606.82 2384.07,2629.1 2380.93,2640.1
  region net C12_1: 2334.43,2575.75 2327.59,2599.79 2318.33,2577.5 2321.46,2566.49
  region net OUT8: 2254.45,2924.14 2247.59,2948.18 2238.35,2925.9 2241.49,2914.9
  region net C13_2: 2284.34,3115.86 2259.34,3115.86 2266.84,3130.86 2276.84,3130.86
  region net C13_2: 2294.83,3075.81 2294.83,3100.81 2309.83,3093.31 2309.83,3083.31
  region net C10_2: 2854.83,3075.81 2854.83,3100.81 2869.83,3093.31 2869.83,3083.31
  region net C13_2: 2337.59,3100.81 2337.59,3075.81 2322.59,3083.31 2322.59,3093.31
  region net IN5: 2644.24,3493.16 2667.86,3493.16 2661.05,3478.16 2651.05,3478.16
  region net IN6: 2604.87,3493.16 2628.49,3493.16 2621.68,3478.16 2611.68,3478.16
  region net IN7: 2565.54,3493.19 2589.16,3493.19 2582.35,3478.19 2572.35,3478.19
  region net IN8: 2526.1,3493.16 2549.72,3493.16 2542.91,3480.75 2532.91,3480.75
  region net U2_6: 2851.52,2744.49 2851.52,2767.82 2866.52,2747.39 2866.52,2733.25
  region net U2_9: 2340.9,2767.81 2340.9,2744.49 2325.9,2733.24 2325.9,2747.39
  region net U2_1: 2829.34,3244.49 2854.34,3244.49 2846.84,3229.49 2836.84,3229.49
  region net U2_7: 2629.34,2754.49 2654.34,2754.49 2646.84,2739.49 2636.84,2739.49
  region net U2_8: 2538.08,2754.49 2563.08,2754.49 2555.58,2739.49 2545.58,2739.49
  region net U2_14: 2338.08,3244.49 2363.08,3244.49 2355.58,3229.49 2345.58,3229.49
  region net OUT5: 3012.15,2870.51 3012.15,2848.24 2997.15,2868.67 2997.15,2882.82
  region net OUT5: 3051.52,2809.49 3051.52,2832.81 3066.52,2812.39 3066.52,2798.24
  region net OUT6: 2710.7,2523.13 2710.7,2498.13 2695.7,2505.63 2695.7,2515.63
  region net OUT7: 2481.72,2498.13 2481.72,2523.13 2496.72,2515.63 2496.72,2505.63
  region net OUT8: 2081.74,2775.51 2106.52,2772.26 2118.48,2785.83 2105.97,2787.46
  region net U2_3: 2715.7,3160.94 2739.03,3160.94 2718.6,3145.94 2704.46,3145.94
  region net U2_12: 2453.39,3160.94 2476.72,3160.94 2487.96,3145.94 2473.82,3145.94
  region net U2_2: 2750.71,2983.18 2750.71,2999.18 2765.71,2996.18 2765.71,2986.18
  region net U2_5: 2679.71,2922.41 2679.71,2906.41 2666.81,2909.4 2666.81,2919.4
  region net U2_10: 2522.71,2906.41 2522.71,2922.41 2535.61,2919.4 2535.61,2909.4
  region net U2_13: 2451.71,2999.18 2451.71,2983.18 2436.71,2986.18 2436.71,2996.18
  text "科技学院" at 2476.21,3380.6 h70
  text "青岛恒星" at 3006.21,3375 h70
  text "2022.7.1" at 2886.21,2360 h60
  text "亥伯森" at 2521.21,2345 h70